# Altium PCB mpu6050.PcbDoc
Units mm, origin at the board's own origin, x right, y up, seen from the top; angles counter-clockwise.
Board outline 152.4 x 101.6 mm, 2 copper layers (Top Layer, Bottom Layer); 6 components, 7 nets, 38 pads, 0 vias.
Unrouted connection lines stored in the file: 7.
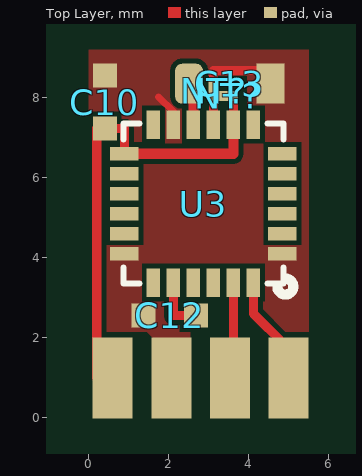
[diagram p0: Top Layer view]
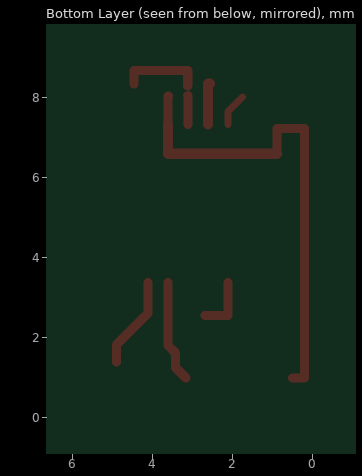
[diagram p1: Bottom Layer view, seen from below]

## Layer stack, top to bottom
Top Solder: solder mask 0.0102, Solder Resist, Dk 3.5
Top Layer: signal copper 0.0356
Dielectric 1: dielectric 0.32, FR-4, Dk 4.8
Bottom Layer: signal copper 0.0356
Bottom Solder: solder mask 0.0102, Solder Resist, Dk 3.5

## Board outline
-52.4,-49.936 100,-49.936 100,51.664 -52.4,51.664

## Design rules (kind name [scope] priority, off if disabled: settings)
Clearance [All] p1: gap=0.127
PolygonConnect [All] p1: connectstyle=Direct reliefconductorwidth=0.254 reliefentries=4 polygonreliefangle="90 Angle" airgapwidth=0.254
RoutingVias [All] p1: holewidth=0.711 width=1.27 viastyle="Through Hole" minholewidth=0.711 minwidth=1.27 maxholewidth=0.711 maxwidth=1.27
SolderMaskExpansion [All] p1: expansion=0.102
Width [All] p1: maxlimit=0.254 minlimit=0.001 preferedwidth=0.254
30 further rules are at their usual default settings.

## Components (designator, comment, footprint, x,y, rotation, side; value= is the part's Value field where it differs from the comment)
C10 "Cap402" 0402x 0.405,7.899 r270 top
C12 "Cap603" 0402x 2.03,2.565 r0 top
C13 "Cap402" 0603x 3.529,8.357 r0 top
NT? "NET_TIE" NET_TIE 3.605,8.052 r0 top net-tie
NT? "NET_TIE" NET_TIE 3.123,8.306 r90 top net-tie
U3 "MPU-6050" IMU-3000 2.869,5.359 r180 top

## Footprints (in the part's own frame and the unit in brackets; to place one, negate y for a bottom-side part, rotate by r counter-clockwise, add the part's x,y. Pads: shape width x height; smd on the part's side, far side on the other; paste and mask are expansions set on the pad)
0402x [mm] "Chip Capacitor, Body 1.0x0.5mm, IPC Medium Density"
  rect 0.6x0.6 smd: 1(-0.66,0) 2(0.66,0)
  body extent -0.5,-0.25 0.5,0.25, height 0.6
0603x [mm] "Chip Resistor; Body 1.6 x 0.8 mm (LxW typ)"
  rrect50% 0.7x1 smd: 1(-1.016,0)
  rect 0.7x1 smd: 2(1.016,0)
IMU-3000 [mm]
  rect 0.711x0.337 smd paste-0.03 mask+0.04: 1(-1.975,1.25) 2(-1.975,0.75) 3(-1.975,0.25) 4(-1.975,-0.25) 5(-1.975,-0.75) 6(-1.975,-1.25) 13(1.975,-1.25) 14(1.975,-0.75) 15(1.975,-0.25) 16(1.975,0.25) 17(1.975,0.75) 18(1.975,1.25)
  rect 0.337x0.711 smd paste-0.03 mask+0.04: 7(-1.25,-1.975) 8(-0.75,-1.975) 9(-0.25,-1.975) 10(0.25,-1.975) 11(0.75,-1.975) 12(1.25,-1.975) 19(1.25,1.975) 20(0.75,1.975) 21(0.25,1.975) 22(-0.25,1.975) 23(-0.75,1.975) 24(-1.25,1.975)
  silkscreen extent -2.25,-2 2,2.27, body extent -2,-2 2,2, height 0.95
NET_TIE [mil] "Net tie"
  rect 10x10 smd paste+0 mask+0: 1(-9.84,0) 2(0,0)

## Part data
C10 C12 C13: "Capacitor SMD"
NT? NT?: library part "Net tie", "Net tie"
U3: "Invensense MPU-6050  3-axis Gyros & Accel"

## Free pads (board coordinates)
  rect 1x2.032 smd: 0(0.6,1) 1(2.067,1) 2(3.533,1) 3(5,1)

## Nets (pads, with @x,y where several pads share a name; then routed paths per layer and width w, separated by ;. In a path a pad name is that pad's centre, name@x,y a point inside that pad or via, vN(x,y) a via of type N, cw(c..) or ccw(c..) an arc to the next point about the centre after c; other vN are vias at no path point)
3.3V: C10.2 NT?.2@3.605,8.052 pad.0 U3.8 U3.13 | length 12
  Top Layer w0.229: pad.0@0.498,1 0.202,1 0.202,7.239 C10.2 0.894,7.239 U3.13 ; NT?.2@3.605,8.052 3.619,8.052 U3.8
  Top Layer w0.254: U3.13 0.894,6.604 3.619,6.604 U3.8
GND: C10.1 C12.1 C13.2 NT?.2@3.123,8.306 pad.1 U3.1 U3.11 U3.18 | length 2.9
  Top Layer w0.178: 1.751,8.026 2.119,7.659 U3.11
  Top Layer w0.229: NT?.2@3.123,8.306 3.123,8.687 4.469,8.687 C13.2@4.469,8.357
NetC12_2: C12.2 U3.20 | length 1.4
  Top Layer w0.229: U3.20 2.119,2.565 C12.2
NetC13_1: C13.1 U3.10 | length 1.1
  Top Layer w0.254: C13.1@2.564,8.357 2.619,8.357 U3.10
NetNT?_1: NT?.1 U3.9 | length 0.7
  Top Layer w0.229: U3.9 3.119,8.056 NT?.1@3.123,8.056
SCL: pad.2 U3.23 | length 2.6
  Top Layer w0.229: pad.2@3.165,1 3.427,1.262 3.427,1.624 3.619,1.815 U3.23
SDA: pad.3 U3.24 | length 2.3
  Top Layer w0.229: U3.24 4.119,2.612 4.902,1.829 pad.3@4.902,1.404
pads on no net: U3.2 U3.3 U3.4 U3.5 U3.6 U3.7 U3.12 U3.14 U3.15 U3.16 U3.17 U3.19 U3.21 U3.22

## Polygon pours and split planes (outlines as drawn)
GND on Top Layer "111" (solid, pour order 0): 0,9.2 0,0 5.5,0 5.5,9.2

## Other copper
Top Layer:
  pour cut-out: 2.843,8.56 2.843,7.772 3.961,7.772 3.961,8.56
  pour cut-out: 5.69,2.159 5.69,-0.229 -0.025,-0.229 -0.025,2.159 1.448,2.159 1.6,2.007 2.54,2.007 2.54,2.159